# Altium PCB glasses_full_v1_small_revised.PcbDoc (part 1 of 2)
Units mm, origin at the board's own origin, x right, y up, seen from the top; angles counter-clockwise.
Board outline 153.91 x 57.09 mm, 2 copper layers (Top Layer, Bottom Layer); 20 components, 42 nets, 149 pads, 104 vias.
Unrouted connection lines stored in the file: 17.
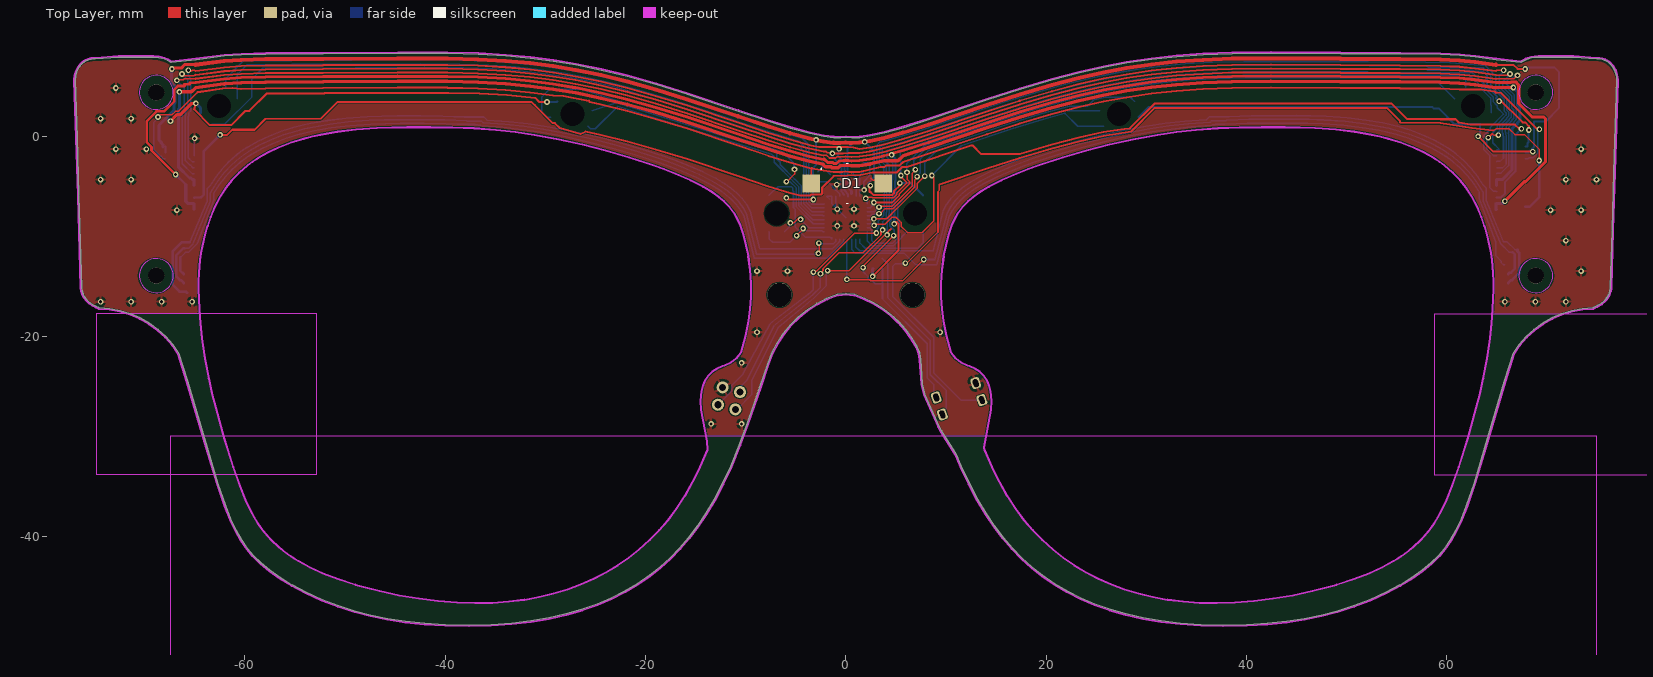
[diagram p0: Top Layer view]
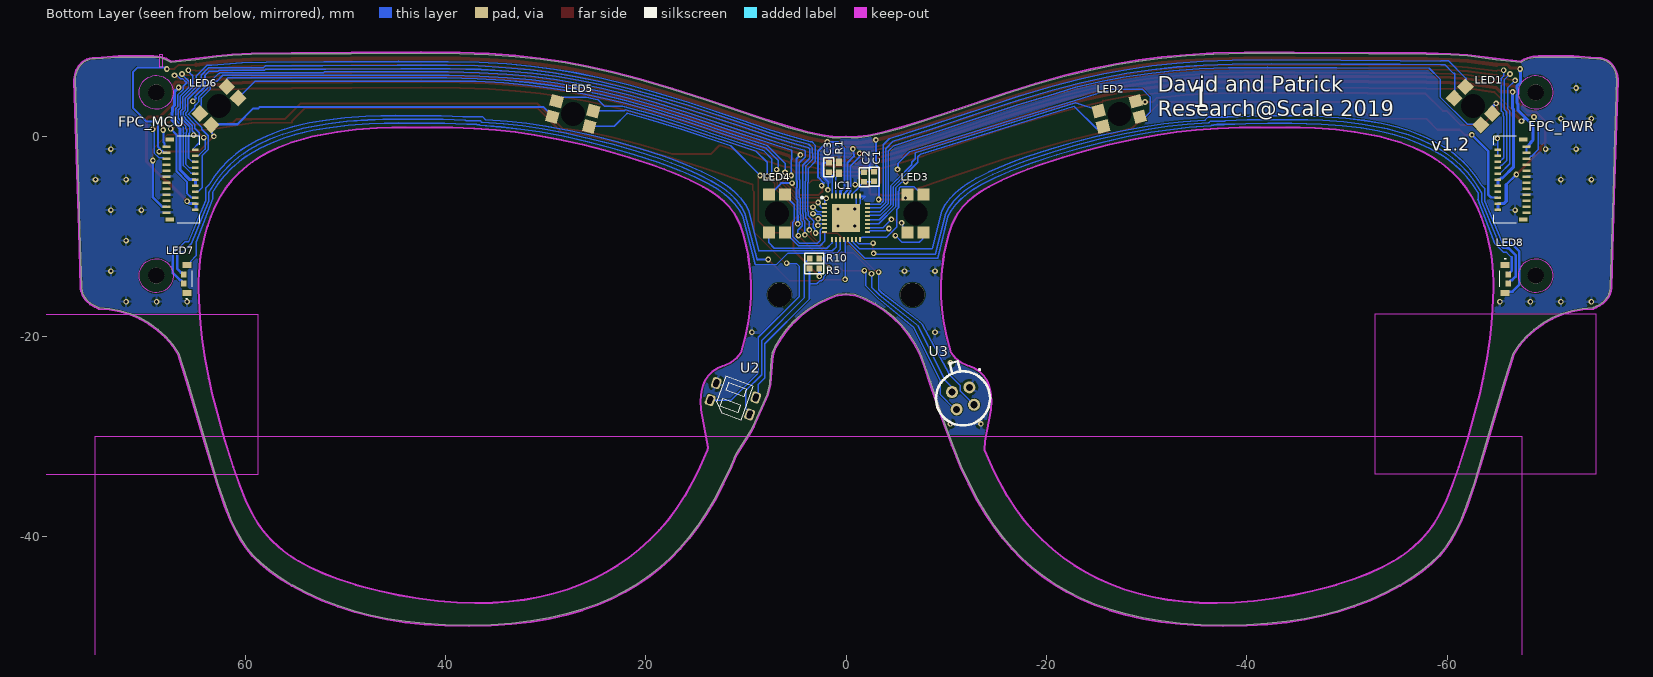
[diagram p1: Bottom Layer view, seen from below]
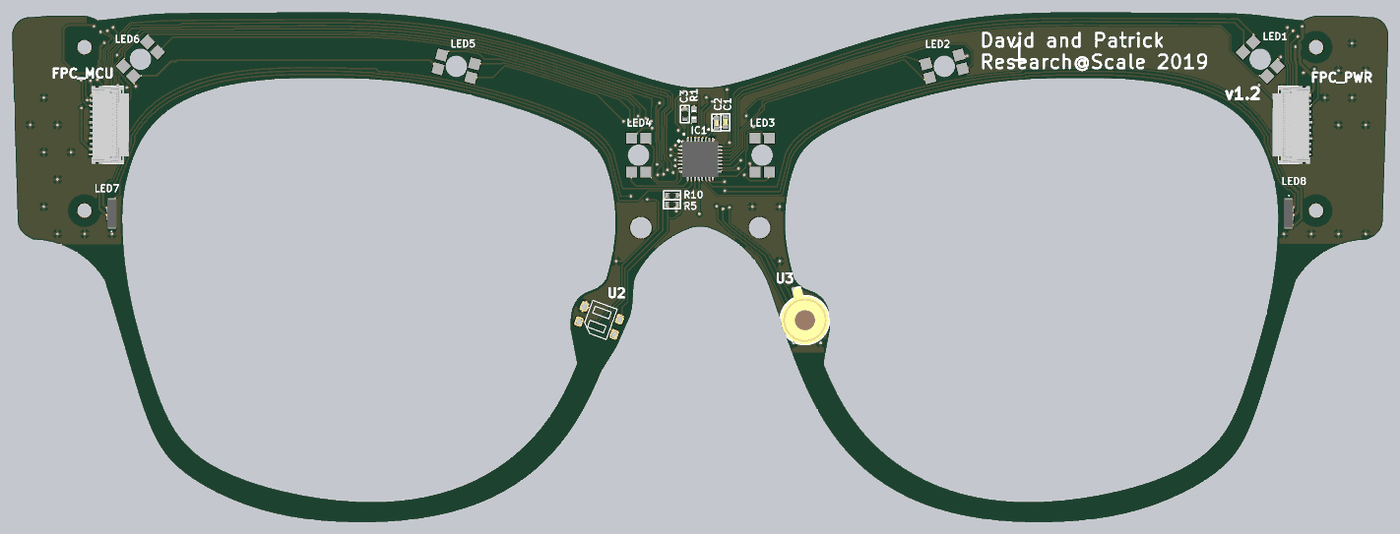
[diagram p3: 3D render of the assembled board from below, using the file's embedded part models]

## Layer stack, top to bottom
Top Solder: solder mask 0.0102, Solder Resist, Dk 3.5
Top Layer: signal copper 0.0356
Dielectric 1: dielectric 0.32, FR-4, Dk 4.8
Bottom Layer: signal copper 0.0356
Bottom Solder: solder mask 0.0102, Solder Resist, Dk 3.5

## Board outline
65.741,-24.446 63.803,-31.059 62.719,-34.637 61.953,-36.875 61.417,-38.237 60.894,-39.354 60.348,-40.316 59.766,-41.157 59.185,-41.848 58.442,-42.575 57.522,-43.332 56.484,-44.067 55.302,-44.787 53.931,-45.509 52.317,-46.242 50.683,-46.873 49.032,-47.404 47.466,-47.811 45.796,-48.153 44.01,-48.426 42.098,-48.627 40.019,-48.752 37.637,-48.794 35.443,-48.742 33.399,-48.601 31.48,-48.376 29.669,-48.068 27.959,-47.681 26.359,-47.222 24.861,-46.693 23.459,-46.096 22.112,-45.414 20.828,-44.651 19.617,-43.815 18.579,-42.992 17.58,-42.091 16.625,-41.117 15.721,-40.072 14.848,-38.931 13.998,-37.671 13.168,-36.278 12.354,-34.729 11.536,-32.966 11.196,-32.136 10.96,-31.678 9.514,-29.375 9.311,-28.992 7.877,-25.746 7.627,-24.724 7.471,-22.267 7.365,-21.643 7.129,-21.056 6.593,-20.149 5.971,-19.298 5.271,-18.512 4.497,-17.796 3.659,-17.158 2.763,-16.604 1.817,-16.139 0.832,-15.767 0.01,-15.692 -0.812,-15.767 -1.873,-16.172 -2.886,-16.684 -3.84,-17.299 -4.726,-18.01 -5.532,-18.809 -6.252,-19.687 -6.876,-20.636 -7.399,-21.644 -7.814,-22.701 -8.581,-24.999 -9.845,-28.673 -10.64,-30.827 -11.516,-32.966 -12.334,-34.729 -13.149,-36.278 -13.979,-37.671 -14.829,-38.931 -15.701,-40.072 -16.606,-41.117 -17.56,-42.091 -18.559,-42.992 -19.598,-43.815 -20.809,-44.651 -22.092,-45.414 -23.44,-46.096 -24.842,-46.693 -26.339,-47.222 -27.94,-47.681 -29.65,-48.068 -31.46,-48.376 -33.379,-48.601 -35.424,-48.742 -37.618,-48.794 -40,-48.752 -42.079,-48.627 -43.991,-48.426 -45.776,-48.153 -47.447,-47.811 -49.013,-47.404 -50.664,-46.873 -52.298,-46.242 -53.911,-45.509 -55.283,-44.787 -56.464,-44.067 -57.503,-43.332 -58.423,-42.575 -59.165,-41.848 -59.747,-41.157 -60.329,-40.316 -60.875,-39.354 -61.398,-38.237 -61.934,-36.876 -62.699,-34.637 -63.784,-31.059 -65.722,-24.446 -66.588,-21.682 -67.193,-20.804 -67.893,-20 -68.678,-19.28 -69.54,-18.652 -70.466,-18.125 -71.445,-17.704 -72.466,-17.397 -73.514,-17.205 -74.578,-17.133 -74.578,-17.129 -74.579,-17.126 -74.581,-17.121 -74.586,-17.116 -74.593,-17.108 -74.61,-17.096 -74.646,-17.076 -74.724,-17.04 -74.888,-16.97 -75.21,-16.805 -75.475,-16.624 -75.734,-16.387 -75.991,-16.067 -76.17,-15.726 -76.26,-15.432 -76.299,-15.133 -76.591,-5.903 -76.771,-0.135 -76.947,5.632 -76.91,6.065 -76.789,6.489 -76.597,6.863 -76.46,7.051 -76.314,7.21 -76.163,7.343 -76.062,7.419 -75.957,7.487 -75.634,7.643 -75.34,7.721 -75.122,7.742 -74.932,7.733 -72.605,7.92 -69.151,7.92 -68.599,7.871 -68.064,7.727 -67.712,7.576 -67.378,7.387 -64.895,7.659 -62.055,8.027 -60.356,8.149 -57.919,8.216 -52.176,8.244 -44.733,8.291 -39.761,8.285 -36.684,8.204 -33.938,8.046 -31.5,7.818 -29.201,7.519 -26.95,7.142 -24.426,6.622 -21.795,5.978 -18.966,5.186 -15.8,4.204 -10.747,2.514 -7.692,1.492 -5.538,0.82 -3.596,0.291 -2.223,0.002 -1.209,-0.131 -0.539,-0.153 0.01,-0.1 0.576,-0.153 1.378,-0.118 2.44,0.037 3.855,0.35 5.74,0.874 8.343,1.7 14.101,3.64 17.389,4.701 20.596,5.648 23.288,6.351 25.729,6.899 28.03,7.33 30.522,7.699 33.033,7.97 35.665,8.155 38.568,8.263 42.467,8.3 49.394,8.256 55.358,8.236 59.379,8.186 61.283,8.095 62.844,7.938 64.933,7.657 67.397,7.387 67.917,7.661 68.418,7.828 68.791,7.897 69.17,7.92 72.624,7.92 74.952,7.733 75.225,7.737 75.51,7.688 75.747,7.606 75.976,7.487 76.143,7.374 76.24,7.295 76.333,7.21 76.576,6.923 76.779,6.558 76.915,6.138 76.955,5.885 76.967,5.632 76.683,-3.596 76.502,-9.364 76.319,-15.133 76.269,-15.476 76.153,-15.81 75.979,-16.114 75.87,-16.257 75.753,-16.387 75.418,-16.682 75.007,-16.924 74.615,-17.106 74.604,-17.116 74.6,-17.123 74.598,-17.127 74.597,-17.13 74.597,-17.133 73.534,-17.205 72.485,-17.397 71.465,-17.704 70.485,-18.125 69.559,-18.652 68.698,-19.28 67.912,-20 67.212,-20.804 66.607,-21.682
cut-out: -41.47,0.938 -43.854,0.94 -45.342,0.915 -46.827,0.859 -48.917,0.71 -50.787,0.487 -52.457,0.2 -53.297,0.016 -54.133,-0.197 -55.401,-0.588 -56.637,-1.065 -57.722,-1.576 -58.692,-2.127 -59.249,-2.494 -59.786,-2.894 -60.58,-3.585 -61.303,-4.347 -61.888,-5.09 -62.466,-5.978 -62.978,-6.947 -63.416,-7.99 -63.719,-8.88 -63.976,-9.78 -64.248,-10.89 -64.386,-11.592 -64.491,-12.301 -64.598,-13.602 -64.622,-14.42 -64.621,-15.24 -64.548,-17.191 -64.441,-18.652 -64.291,-20.105 -64,-22.132 -63.617,-24.145 -63.281,-25.615 -62.909,-27.077 -62.036,-30.207 -61.17,-32.986 -60.51,-34.875 -59.945,-36.271 -59.413,-37.387 -59.07,-38.009 -58.694,-38.615 -58.063,-39.479 -57.354,-40.282 -56.646,-40.953 -55.805,-41.619 -55.241,-42.007 -54.658,-42.369 -53.53,-42.98 -52.199,-43.587 -50.693,-44.168 -48.984,-44.725 -47.772,-45.064 -46.549,-45.367 -44.605,-45.777 -42.647,-46.106 -40.718,-46.345 -38.829,-46.494 -37.022,-46.553 -35.281,-46.524 -33.656,-46.413 -32.103,-46.222 -30.622,-45.956 -29.185,-45.612 -27.812,-45.198 -26.492,-44.713 -25.126,-44.106 -23.932,-43.481 -22.784,-42.788 -21.692,-42.031 -20.664,-41.219 -19.568,-40.23 -18.638,-39.274 -17.771,-38.263 -16.903,-37.106 -16.081,-35.845 -15.305,-34.473 -14.575,-32.986 -13.83,-31.254 -13.869,-30.406 -14.471,-27.242 -14.505,-26.343 -14.4,-25.415 -14.281,-24.854 -14.058,-24.327 -13.738,-23.851 -13.334,-23.444 -12.86,-23.122 -12.333,-22.896 -12.119,-22.828 -11.479,-22.537 -10.925,-22.104 -10.486,-21.555 -10.047,-19.902 -9.736,-18.4 -9.561,-17.195 -9.466,-15.98 -9.462,-14.634 -9.554,-13.288 -9.75,-11.889 -9.964,-10.838 -10.237,-9.798 -10.544,-8.884 -10.832,-8.225 -11.185,-7.603 -11.644,-6.987 -12.178,-6.43 -12.731,-5.965 -13.316,-5.548 -14.243,-4.99 -15.533,-4.338 -17.082,-3.664 -18.182,-3.235 -19.293,-2.833 -21.631,-2.069 -23.997,-1.385 -26.317,-0.789 -28.654,-0.266 -31.083,0.186 -33.006,0.47 -34.937,0.683 -37.107,0.837 -39.288,0.914
cut-out: 45.361,0.915 43.873,0.94 41.489,0.938 39.307,0.914 37.127,0.837 34.956,0.683 33.026,0.47 31.102,0.186 28.674,-0.266 26.336,-0.789 24.016,-1.385 21.65,-2.069 19.312,-2.833 18.201,-3.235 17.101,-3.664 15.553,-4.338 14.262,-4.99 13.336,-5.548 12.75,-5.965 12.197,-6.43 11.663,-6.987 11.204,-7.603 10.851,-8.225 10.563,-8.884 10.256,-9.798 9.983,-10.838 9.769,-11.889 9.574,-13.288 9.481,-14.634 9.486,-15.98 9.58,-17.195 9.755,-18.4 10.066,-19.902 10.505,-21.555 10.944,-22.104 11.499,-22.537 12.139,-22.828 12.352,-22.896 12.879,-23.122 13.353,-23.444 13.757,-23.851 14.077,-24.327 14.3,-24.854 14.419,-25.415 14.524,-26.343 14.491,-27.242 13.77,-31.029 13.768,-31.041 13.849,-31.254 14.594,-32.986 15.324,-34.473 16.1,-35.845 16.923,-37.106 17.79,-38.263 18.658,-39.274 19.588,-40.23 20.684,-41.219 21.712,-42.031 22.804,-42.788 23.952,-43.481 25.145,-44.106 26.512,-44.713 27.831,-45.198 29.205,-45.612 30.641,-45.956 32.122,-46.222 33.676,-46.413 35.3,-46.524 37.041,-46.553 38.848,-46.494 40.737,-46.345 42.666,-46.106 44.625,-45.777 46.568,-45.367 47.791,-45.064 49.004,-44.725 50.713,-44.168 52.219,-43.587 53.55,-42.98 54.677,-42.369 55.26,-42.007 55.825,-41.619 56.666,-40.953 57.373,-40.282 58.082,-39.479 58.714,-38.615 59.09,-38.009 59.432,-37.387 59.965,-36.271 60.53,-34.875 61.19,-32.986 62.055,-30.207 62.929,-27.077 63.3,-25.615 63.636,-24.145 64.02,-22.132 64.31,-20.105 64.46,-18.652 64.568,-17.191 64.641,-15.24 64.642,-14.42 64.618,-13.602 64.51,-12.301 64.405,-11.592 64.268,-10.89 63.995,-9.78 63.738,-8.88 63.436,-7.99 62.997,-6.947 62.486,-5.978 61.908,-5.09 61.322,-4.347 60.6,-3.585 59.805,-2.894 59.268,-2.494 58.711,-2.126 57.741,-1.576 56.656,-1.065 55.42,-0.588 54.152,-0.197 53.316,0.016 52.476,0.2 50.807,0.487 48.936,0.71 46.847,0.859

## Design rules (kind name [scope] priority, off if disabled: settings)
Clearance [All] p1: gap=0.102 ignorepadtopadclearanceinfootprint=FALSE except(0: Arc-Hole Track-Hole SMDPad-Hole THPad-Hole Via-Hole Fill-Hole Poly-Hole Region-Hole Text-Hole)
PolygonConnect [All] p1: connectstyle=Relief reliefconductorwidth=0.254 reliefentries=4 polygonreliefangle="90 Angle" airgapwidth=0.254
RoutingVias [All] p1: holewidth=0.305 width=0.559 viastyle="Through Hole" minholewidth=0.254 minwidth=0.508 maxholewidth=0.381 maxwidth=0.635
SolderMaskExpansion [All] p1: expansion=0.102
Width PWR [InNet('3.3V') or InNet('5V')or InNet('VBAT')] p1: maxlimit=0.406 minlimit=0.203 preferedwidth=0.305 minimp=50.000000 maximp=50.000000 favimp=50.000000
Width [All] p2: maxlimit=0.305 minlimit=0.152 preferedwidth=0.254
30 further rules are at their usual default settings.

## Classes and differential pairs
component class Sch_led: C1 C2 C3 IC1 LED1 LED2 LED3 LED4 LED5 LED6 LED7 LED8 R1
component class Sch_front: D1 FPC_MCU FPC_PWR R5 R10 U2 U3 U4 U5 U8 U9

## Components (designator, comment, footprint, x,y, rotation, side; value= is the part's Value field where it differs from the comment)
C1 "0.10µF" 0402C -2.794,-4.013 r90 bottom
C2 "10µF" 0402C -1.803,-4.064 r90 bottom
C3 "1µF" 0402R 1.727,-3.099 r270 bottom
D1 "VBPW34FASR" VBPW34FAS 0.137,-4.699 r0 top
FPC_MCU "502250-2391" 5022502391 66.304,-4.318 r270 bottom
FPC_PWR "502250-2391" 5022502391 -66.411,-4.318 r90 bottom
IC1 "LP5024RSMR" QFN40P400X400X100-33N-D 0,-8.128 r180 bottom
LED1 "156120M173000" 156120M173000 -62.611,3.048 r45 bottom
LED2 "156120M173000" 156120M173000 -27.283,2.248 r345 bottom
LED3 "156120M173000" 156120M173000 -6.907,-7.7 r270 bottom
LED4 "156120M173000" 156120M173000 6.907,-7.7 r270 bottom
LED5 "156120M173000" 156120M173000 27.283,2.248 r195 bottom
LED6 "156120M173000" 156120M173000 62.611,3.048 r135 bottom
LED7 "155124M173200" 155124M173200 65.796,-14.224 r90 bottom
LED8 "155124M173200" 155124M173200 -65.776,-14.224 r270 bottom
R1 "4.7k" RESC1005X35N 0.711,-3.15 r90 bottom
R5 "50K" 0402R 3.175,-13.208 r180 bottom
R10 "100" 0402R 3.165,-12.192 r180 bottom
U2 "QRE1113" QRE1113_DIP 12.964,-24.638 r290 bottom
U3 "ZTP-135SR" ZTP-135SR -11.674,-26.162 r210 bottom

## Footprints (in the part's own frame and the unit in brackets; to place one, negate y for a bottom-side part, rotate by r counter-clockwise, add the part's x,y. Pads: shape width x height; smd on the part's side, far side on the other; paste and mask are expansions set on the pad)
0402C [mm]
  rect 0.559x0.6 smd: 1(-0.48,0) 2(0.48,0)
  silkscreen extent -0.95,-0.5 0.95,0.5, body extent -0.48,-0.25 0.48,0.25, height 0.5
0402R [mm]
  rect 0.559x0.6 smd: 1(-0.48,0) 2(0.48,0)
  silkscreen extent -0.95,-0.5 0.95,0.5, body extent -0.46,-0.25 0.5,0.25, height 0.3
155124M173200 [mm]
  rect 0.6x0.9 smd: 1(-1.4,0) 2(1.4,0)
  rect 0.6x0.55 smd: 3(-0.45,0.325) 4(0.45,0.325)
  silkscreen extent -2.05,-0.5 0.8,0.1, body extent -1.6,-0.5 1.6,0.5, height 1.1
156120M173000 [mm]
  rect 1.2x1.2 smd: 1(-1.9,-0.8) 2(-1.9,0.8) 3(1.9,0.8) 4(1.9,-0.8)
  round 0 hole 2.4 unplated: ""(0,0)
5022502391 [mm]
  rect 0.26x0.8 smd: 1(-3.3,-1.545) 3(-2.7,-1.545) 5(-2.1,-1.545) 7(-1.5,-1.545) 9(-0.9,-1.545) 11(-0.3,-1.545) 13(0.3,-1.545) 15(0.9,-1.545) 17(1.5,-1.545) 19(2.1,-1.545) 21(2.7,-1.545) 23(3.3,-1.545)
  rect 0.26x0.65 smd: 2(-3,1.33) 4(-2.4,1.33) 6(-1.8,1.33) 8(-1.2,1.33) 10(-0.6,1.33) 12(0,1.33) 14(0.6,1.33) 16(1.2,1.33) 18(1.8,1.33) 20(2.4,1.33) 22(3,1.33)
  rect 0.4x0.85 smd: MP1(-4,-1.22) MP2(4,-1.22)
  silkscreen extent -4.35,-0.5 4.35,1.77, body extent -4.35,-1.76 4.35,2.43, height 0.9
QFN40P400X400X100-33N-D [mm]
  rect 0.5x0.2 smd: 1(-2.15,1.4) 2(-2.15,1) 3(-2.15,0.6) 4(-2.15,0.2) 5(-2.15,-0.2) 6(-2.15,-0.6) 7(-2.15,-1) 8(-2.15,-1.4) 17(2.15,-1.4) 18(2.15,-1) 19(2.15,-0.6) 20(2.15,-0.2) 21(2.15,0.2) 22(2.15,0.6) 23(2.15,1) 24(2.15,1.4)
  rect 0.2x0.5 smd: 9(-1.4,-2.15) 10(-1,-2.15) 11(-0.6,-2.15) 12(-0.2,-2.15) 13(0.2,-2.15) 14(0.6,-2.15) 15(1,-2.15) 16(1.4,-2.15) 25(1.4,2.15) 26(1,2.15) 27(0.6,2.15) 28(0.2,2.15) 29(-0.2,2.15) 30(-0.6,2.15) 31(-1,2.15) 32(-1.4,2.15)
  rect 2.8x2.8 smd: 33(0,0)
  silkscreen extent -2.5,1.9 -2.3,2.1, body extent -2.05,-2.05 2.05,2.05, height 1
QRE1113_DIP [mm] "QRE1113 IR PHOTODIODE/TRANSISTOR PAIR"
  rrect50% 1.1x0.9 hole 0.5 slot 0.8 at 0 deg: 1(1.8,0) 2(1.8,4.2) 3(0,4.2) 4(0,0)
  silkscreen extent -0.96,0.65 2.64,3.55
RESC1005X35N [mm]
  rect 0.75x0.6 smd: 1(-0.55,0) 2(0.55,0)
  body extent -0.5,-0.25 0.5,0.25, height 0.35
VBPW34FAS [mm] "IR Photodiode SMD (Vive)"
  rect 1.75x1.8 smd: 1(-3.575,0) 2(3.575,0)
  silkscreen extent -2.65,-2 0.08,2, body extent -3.29,-1.95 3.11,1.95, height 1.48
ZTP-135SR [mm]
  round 1.2 hole 0.7: 1(0,1.27) 2(1.27,0) 3(0,-1.27) 4(-1.27,0)
  silkscreen extent -2.9,-2.7 2.7,3.35, body extent -4.43,-3.77 3.8,4.46, height 3.4

## Part data
C1: library part GCM155R71C104KA55D, "CAP CER 0.1UF 16V X7R 0402", Digi-Key Part Number=490-4759-1-ND, Manufacturer="Murata Electronics North America", Operating Temperature="-55°C ~ 125°C", Package / Case="0402 (1005 Metric)", Ratings=AEC-Q200, Temperature Coefficient=X7R, Tolerance=±10%, Voltage=16V, @ qty=0, Applications=Automotive, Datasheets=http://www.murata.com/~/media/webrenewal/support/library/catalog/products/capacitor/mlcc/c03e.ashx, Factory Stock=0, Features=-, Height - Seated (Max)=-, Image=//media.digikey.com/Renders/Murata%20Renders/ZRB-SERIES-0402.jpg, Lead Spacing=-, Lead Style=-, Minimum Quantity=1, Mounting Type="Surface Mount, MLCC", Packaging="Cut Tape (CT)", Part Number=GCM155R71C104KA55D, Part Status=Active, Quantity Available=734194, Series=GCM, Size / Dimension="0.039\" L x 0.020\" W (1.00mm x 0.50mm)", Thickness (Max)="0.022\" (0.55mm)", Unit Price (USD)=0.1
C2: library part GRJ155R60J106ME11D, "CAP CER 10UF 6.3V X5R 0402", Digi-Key Part Number=490-13211-1-ND, Manufacturer="Murata Electronics North America", Operating Temperature="-55°C ~ 85°C", Package / Case="0402 (1005 Metric)", Ratings=-, Temperature Coefficient=X5R, Tolerance=±20%, Voltage=6.3V, @ qty=0, Applications="Boardflex Sensitive", Datasheets=http://psearch.en.murata.com/capacitor/product/GRJ155R60J106ME11%23.pdf, Factory Stock=0, Features="Derating Recommended, Soft Termination", Height - Seated (Max)=-, Image=//media.digikey.com/Renders/Murata%20Renders/ZRB-SERIES-0402.jpg, Lead Spacing=-, Lead Style=-, Minimum Quantity=1, Mounting Type="Surface Mount, MLCC", Packaging="Cut Tape (CT)", Part Number=GRJ155R60J106ME11D, Part Status=Active, Quantity Available=64064, Series=GRJ, Size / Dimension="0.039\" L x 0.020\" W (1.00mm x 0.50mm)", Thickness (Max)="0.028\" (0.70mm)", Unit Price (USD)=0.23
C3: library part GCM155C71A105KE38D, "CAP CER 1UF 10V X7S 0402", Digi-Key Part Number=490-13409-1-ND, Manufacturer="Murata Electronics North America", Operating Temperature="-55°C ~ 125°C", Package / Case="0402 (1005 Metric)", Ratings=AEC-Q200, Temperature Coefficient=X7S, Tolerance=±10%, Voltage=10V, @ qty=0, Applications=Automotive, Datasheets=http://www.murata.com/~/media/webrenewal/support/library/catalog/products/capacitor/mlcc/c03e.ashx, Factory Stock=0, Features=-, Height - Seated (Max)=-, Image=//media.digikey.com/Renders/Murata%20Renders/ZRB-SERIES-0402.jpg, Lead Spacing=-, Lead Style=-, Minimum Quantity=1, Mounting Type="Surface Mount, MLCC", Packaging="Cut Tape (CT)", Part Number=GCM155C71A105KE38D, Part Status=Active, Quantity Available=7240, Series=GCM, Size / Dimension="0.039\" L x 0.020\" W (1.00mm x 0.50mm)", Thickness (Max)="0.022\" (0.55mm)", Unit Price (USD)=0.12
D1: "Diode", Manufacturer_Name=Vishay, Mouser Part Number=782-VBPW34FASR, RS Part Number=7689401, Datasheet Link=https://www.vishay.com/docs/81127/vbpw34fa.pdf, Height=1.3mm, Manufacturer_Part_Number=VBPW34FASR, Mouser Price/Stock=https://www.mouser.com/Search/Refine.aspx?Keyword=782-VBPW34FASR, RS Price/Stock=https://uk.rs-online.com/web/p/products/7689401
FPC_MCU FPC_PWR: "Connector", Manufacturer_Name=Molex, Mouser Part Number=538-502250-2391, Datasheet Link=https://www.molex.com/pdm_docs/sd/5022501791_sd.pdf, Height=1.85mm, Manufacturer_Part_Number=502250-2391, Mouser Price/Stock=https://www.mouser.com/Search/Refine.aspx?Keyword=538-502250-2391, System=Connector
IC1: "Integrated Circuit", Manufacturer_Name="Texas Instruments", Mouser Part Number=595-LP5024RSMR, Datasheet Link=http://www.ti.com/lit/gpn/lp5024, Height=1mm, Manufacturer_Part_Number=LP5024RSMR, Mouser Price/Stock=https://www.mouser.com/Search/Refine.aspx?Keyword=595-LP5024RSMR
LED1 LED2 LED3 LED4 LED5 LED6: "LED", Manufacturer_Name="Wurth Elektronik", Mouser Part Number=710-156120M173000, RS Part Number=1847218, Datasheet Link=https://katalog.we-online.de/led/datasheet/156120M173000.pdf, Height=1.25mm, Manufacturer_Part_Number=156120M173000, Mouser Price/Stock=https://www.mouser.com/Search/Refine.aspx?Keyword=710-156120M173000, RS Price/Stock=https://uk.rs-online.com/web/p/products/1847218
LED7 LED8: "LED", Manufacturer_Name="Wurth Elektronik", Mouser Part Number=710-155124M173200, RS Part Number=1766176P, Datasheet Link=https://www.mouser.com/ds/2/445/155124M173200-1113601.pdf, Height=1mm, Manufacturer_Part_Number=155124M173200, Mouser Price/Stock=https://www.mouser.com/Search/Refine.aspx?Keyword=710-155124M173200, RS Price/Stock=http://uk.rs-online.com/web/p/products/1766176P
R1: library part CRCW04024K70FKEDC, "Resistor_4.7k", Manufacturer_Name=Vishay, Mouser Part Number=71-CRCW04024K70FKEDC, Datasheet Link=http://www.mouser.com/datasheet/2/427/crcwce3-1223726.pdf, Height=0.35mm, Manufacturer_Part_Number=CRCW04024K70FKEDC, Mouser Price/Stock=https://www.mouser.com/Search/Refine.aspx?Keyword=71-CRCW04024K70FKEDC
R5 R10: library part Resistor
U2: "IR Emitter and Receiver"
U3: "Undefined or Miscellaneous", Manufacturer_Name="Amphenol Advanced Sensors", Mouser Part Number=527-ZTP-135SR, Allied_Number=70282698, Allied Price/Stock=https://www.alliedelec.com/amphenol-advanced-sensors-ztp-135sr/70282698/, Datasheet Link=https://www.amphenol-sensors.com/en/component/edocman/370-thermopile-ir-sensor-applications/download?Itemid=7967, Manufacturer_Part_Number=ZTP-135SR, Mouser Price/Stock=https://www.mouser.com/Search/Refine.aspx?Keyword=527-ZTP-135SR

## Free pads (board coordinates)
  round 1.6 hole 1.6: 1(-68.859,-13.907) 1(-68.859,4.39) 1(68.879,-13.907) 1(68.879,4.39)
  round 2.4 hole 2.4: 1(-6.626,-15.82) 1(6.646,-15.82)

## Via types
v1: diameter 0.559, hole 0.305, Top Layer to Bottom Layer, tented both sides, 100 vias
v2: diameter 0.559, hole 0.305, Top Layer to Bottom Layer, tented top, 4 vias

## Nets (pads, with @x,y where several pads share a name; then routed paths per layer and width w, separated by ;. In a path a pad name is that pad's centre, name@x,y a point inside that pad or via, vN(x,y) a via of type N, cw(c..) or ccw(c..) an arc to the next point about the centre after c; other vN are vias at no path point)
3.3V: FPC_MCU.20 FPC_MCU.22 FPC_PWR.2 FPC_PWR.4 R5.2 | length 185.1
  Top Layer w0.203: v1(2.667,-13.97) 5.254,-11.383 5.254,-9.71 5.232,-9.688 5.232,-8.707 5.055,-8.529 4.846,-8.738 v1(4.826,-8.738)
  Top Layer w0.254: v1(-66.929,-3.81) -69.332,-1.407 -69.332,-1.06 -69.799,-0.593 -69.799,1.531 -68.841,2.489 -68.072,2.489 -67.056,3.505 -67.056,4.674 -66.7,5.029 -66.04,5.029 -66.04,5.207 -65.532,5.207 -65.532,5.334 -65.449,5.334 ccw(c-65.449,5.466) -65.356,5.373 -64.925,5.373
  Top Layer w0.305: -64.925,5.373 -62.084,5.74 -60.385,5.862 -57.949,5.93 -52.205,5.957 -44.762,6.004 -39.79,5.998 -36.713,5.917 -33.967,5.759 -31.529,5.532 -29.23,5.233 -26.979,4.855 -24.455,4.335 -21.824,3.691 -18.995,2.899 -15.829,1.917 -10.776,0.228 -7.721,-0.794 -5.567,-1.467 -3.625,-1.995 -2.252,-2.285 -2.149,-2.285 -1.819,-2.615 -1.308,-2.615 -1.218,-2.705 -0.936,-2.705 -0.693,-2.462 -0.591,-2.462 -0.568,-2.439 -0.019,-2.386 0.547,-2.44 1.349,-2.404 2.411,-2.249 3.826,-1.936 v1@4.528,-1.741 ; v1(4.559,-1.852) 4.559,-1.732 5.711,-1.412 8.314,-0.587 14.072,1.353 17.36,2.415 20.567,3.362 23.259,4.064 25.7,4.612 28.001,5.044 30.493,5.413 33.003,5.683 35.636,5.868 38.539,5.976 42.438,6.013 49.365,5.97 55.329,5.949 59.349,5.9 61.254,5.808 62.815,5.652 64.904,5.37 66.389,5.37 66.429,5.41 66.972,5.41 66.972,5.309 67.183,5.098 67.183,3.277 68.529,1.93 69.69,1.93 69.85,1.77 69.85,-2.532 67.851,-4.531 67.732,-4.531 v1(65.786,-6.477)
  Bottom Layer w0.203: v1(4.559,-1.852) 4.953,-2.246 4.953,-4.423 4.902,-4.474 4.902,-5.077 4.953,-5.127 4.953,-6.226 4.851,-6.327 4.851,-7.95 4.826,-7.925 v1(4.826,-8.738)
  Bottom Layer w0.254: v1(-66.929,-3.81) -65.913,-4.826
  Bottom Layer w0.305: -65.913,-4.826 -65.913,-6.477 -65.672,-6.718 FPC_PWR.4@-65.081,-6.718 FPC_PWR.2@-65.081,-7.318 ; v1(2.667,-13.97) 2.667,-13.236 R5.2@2.695,-13.208 ; FPC_MCU.22@64.974,-7.318 64.919,-7.318 64.897,-7.296 64.897,-6.74 64.919,-6.718 FPC_MCU.20@64.974,-6.718 65.545,-6.718 v1(65.786,-6.477)
5V: FPC_MCU.12 FPC_MCU.14 FPC_PWR.10 FPC_PWR.12 | length 157.7
  Top Layer w0.305: 64.904,4.862 66.623,4.862 66.65,4.836 v1(66.65,4.877)
  Top Layer w0.356: v1(-66.548,4.445) -65.344,4.445 -64.925,4.865 -62.084,5.232 -60.385,5.354 -57.949,5.422 -52.205,5.449 -44.762,5.496 -39.79,5.49 -36.713,5.409 -33.967,5.251 -31.529,5.024 -29.23,4.725 -26.979,4.347 -24.455,3.827 -21.824,3.183 -18.995,2.391 -15.829,1.409 -10.776,-0.28 -7.721,-1.302 -5.567,-1.975 -3.625,-2.503 -2.252,-2.793 -2.252,-2.827 -2.032,-3.047 -1.487,-3.047 -1.397,-3.136 -0.757,-3.136 -0.568,-2.947 -0.019,-2.894 0.547,-2.948 1.349,-2.912 2.411,-2.757 3.826,-2.444 5.194,-2.444 5.711,-1.927 ; 5.711,-1.92 8.314,-1.095 14.072,0.845 17.36,1.907 20.567,2.854 23.259,3.556 25.7,4.104 28.001,4.536 30.493,4.905 33.003,5.175 35.636,5.36 38.539,5.468 42.438,5.505 49.365,5.462 55.329,5.441 59.349,5.392 61.254,5.3 62.815,5.144 64.904,4.862
  Bottom Layer w0.305: v1(-66.548,4.445) -66.548,4.14 -66.523,4.114 -66.523,2.841 -66.625,2.738 -66.625,2.41 -66.65,2.386 -66.65,-3.036 -65.533,-4.153 -65.397,-4.153 -65.231,-4.318 FPC_PWR.12@-65.081,-4.318 FPC_PWR.10@-65.081,-4.918 ; FPC_MCU.14@64.974,-4.918 FPC_MCU.12@64.974,-4.318 65.532,-4.318 66.497,-3.353 66.497,0.737 67.076,1.315 67.076,1.378 67.31,1.612 67.31,2.371 67.263,2.418 67.263,2.89 67.076,3.077 67.076,4.45 v1(66.65,4.877)
ANALOG_EXP_CONN: FPC_MCU.18 FPC_PWR.6 | length 153.7
  Top Layer w0.203: v1(-62.484,0.152) -61.773,0.152 -61.265,0.66 -59.027,0.66 -57.949,1.739 -52.425,1.765 -50.736,3.454 -31.406,3.454 -31.076,3.124 -31.064,3.124 -29.261,1.321 -29.058,1.321 -28.55,0.813 -26.518,0.254 -26.008,0.464 -24.455,0.144 -21.824,-0.5 -18.995,-1.292 -15.829,-2.274 -10.776,-3.963 -7.721,-4.985 -5.567,-5.658 -4.596,-5.922 -3.557,-5.922 -3.437,-5.802 -2.479,-5.802 -2.36,-5.683 -2.36,-5.103 -1.229,-3.972 1.475,-3.852 2.633,-3.596 5.102,-3.596 5.65,-3.048 6.096,-3.048 12.497,-0.914 12.649,-0.914 13.511,-1.776 17.36,-1.776 20.567,-0.829 23.259,-0.127 25.7,0.421 27.818,0.719 28.354,0.794 30.862,3.302 54.458,3.302 56.018,1.741 56.693,1.741 59.349,1.709 60.877,1.709 61.214,1.372 62.367,1.19 62.438,1.179 64.904,1.179 ; 64.904,1.181 66.795,1.181 67.214,0.762 v1(67.437,0.762)
  Bottom Layer w0.203: FPC_MCU.18@64.974,-6.118 64.996,-6.096 65.405,-6.096 65.786,-5.715 65.786,-4.567 66.853,-3.5 66.853,0.178 v1(67.437,0.762)
  Bottom Layer w0.254: FPC_PWR.6@-65.081,-6.118 -64.389,-6.096 -64.135,-5.842 -64.135,-1.499 v1(-62.484,0.152)
BLINK_PWM: FPC_MCU.21 U2.1 | length 98.8
  Top Layer w0.152: v1(5.944,-12.649) 6.045,-12.7 9.195,-9.55 9.195,-5.512 9.343,-5.364 9.343,-4.812 ; 64.59,0.563 64.94,0.762 66.217,0.762 66.801,0.178 67.767,0.178 69.215,-1.27 v1(69.215,-2.413)
  Top Layer w0.203: 9.343,-4.812 14.072,-3.219 17.36,-2.157 20.567,-1.21 23.259,-0.508 25.7,0.04 28.48,0.489 30.836,2.845 54,2.845 55.329,1.517 55.329,1.377 59.349,1.328 62.524,0.842 64.59,0.563
  Bottom Layer w0.152: v1@5.944,-12.7 4.953,-12.7 4.699,-12.954 4.699,-16.002 8.763,-20.066 8.763,-23.622 11.47,-26.329 U2.1@13.579,-26.329
  Bottom Layer w0.254: FPC_MCU.21@67.849,-7.018 67.852,-7.015 68.296,-7.015 69.215,-6.096 v1(69.215,-2.413)
BLINK_SIG: FPC_MCU.16 R5.1 U2.3 | length 105.9
  Top Layer w0.152: v1(1.727,-13.106) 1.727,-12.954 v1(4.772,-9.91)
  Bottom Layer w0.152: v1(1.727,-13.106) 1.727,-13.513 2.21,-13.995 2.21,-14.159 2.478,-14.427 2.642,-14.427 2.932,-14.718 3.655,-14.718 ; R5.1@3.655,-13.208 3.655,-14.718 ; v1(4.772,-9.91) 4.826,-9.855 4.826,-9.384 4.369,-8.927 4.369,-8.548 4.547,-8.37 4.547,-7.809 4.572,-7.784 4.572,-6.211 4.674,-6.11 4.674,-5.243 4.623,-5.192 4.623,-4.358 4.674,-4.307 4.674,-2.642 4.064,-2.032 4.064,-1.472 4.162,-1.374 5.496,-1.011 7.651,-0.338 10.706,0.683 15.759,2.373 18.925,3.355 21.754,4.147 24.385,4.791 26.908,5.311 29.16,5.688 31.459,5.988 33.897,6.215 36.643,6.373 39.719,6.454 44.692,6.46 52.088,6.46 52.192,6.356 62.504,6.356 62.594,6.265 62.67,6.265 63.729,5.207 63.729,4.837 64.618,3.948 64.618,3.468 65.038,3.048 65.038,2.853 65.663,2.227 64.324,0.889 64.324,0.709 63.678,0.062 63.678,-1.299 64.262,-1.883 64.262,-5.08 64.646,-5.464 64.92,-5.464 FPC_MCU.16@64.974,-5.518 ; U2.3@9.017,-26.074 8.791,-25.849 8.791,-25.482 8.763,-25.454 8.763,-24.765 8.128,-24.13 8.128,-20.701 3.655,-16.228 3.655,-14.718
GND: C1.2 C2.2 C3.1 D1.2 FPC_MCU.11 FPC_MCU.17 FPC_MCU.23 FPC_PWR.7 FPC_PWR.13 FPC_PWR.20 FPC_PWR.22 IC1.25 IC1.26 IC1.33 R1.2 R10.2 U2.4 U3.1 | length 13.6
  Top Layer w0.152: 2.489,-4.166 2.697,-4.374 3.387,-4.374 D1.2@3.712,-4.699
  Bottom Layer w0.152: FPC_PWR.20@-65.081,-1.918 FPC_PWR.22@-65.081,-1.318 -65.081,-0.26 v1(-65.024,-0.203) ; C1.2@-2.794,-3.533 -2.773,-3.533 -2.57,-3.33 -2.57,-3.309 -2.337,-3.076 -2.337,-2.591 ; C2.2@-1.803,-3.584 -1.783,-3.584 -1.58,-3.787 C2.2@-1.58,-3.808 ; -1.626,-6.299 -1.626,-6.266 -1.914,-5.978 IC1.25@-1.4,-5.978 -1.4,-6.728 IC1.33@-1,-7.128 ; IC1.26@-1,-5.978 IC1.33@-1,-7.128 ; v1(-0.914,-4.826) v1@-0.864,-4.877 ; v1@-0.864,-4.928 v1@-0.864,-4.877 ; -0.864,-4.524 v1@-0.864,-4.877 ; IC1.33@0,-8.128 IC1.33@-1,-7.128 ; C3.1@1.727,-2.619 2.298,-2.619 2.388,-2.708 2.388,-3.912 1.778,-4.521 1.778,-5.131 1.88,-5.232 1.88,-5.283 v1(1.829,-5.334)
  other v1: -13.452,-28.702 -10.404,-28.702 -10.404,-22.606 -8.88,-19.558 9.408,-19.558 -74.412,-16.51 -71.364,-16.51 -68.316,-16.51 -65.268,-16.51 65.796,-16.51 68.844,-16.51 71.892,-16.51 -8.88,-13.462 -5.832,-13.462 73.416,-13.462 71.892,-10.414 -66.792,-7.366 70.368,-7.366 73.416,-7.366 -74.412,-4.318 -71.364,-4.318 71.892,-4.318 74.94,-4.318 -72.888,-1.27 -69.84,-1.27 73.416,-1.27 -74.412,1.778 -71.364,1.778 -72.888,4.826
  other v2: -0.864,-8.941 0.813,-8.941 -0.864,-7.264 0.813,-7.264
I2C1_SCL: FPC_MCU.6 FPC_PWR.18 IC1.29 | length 158.9
  Top Layer w0.152: v1@-65.396,6.493 -65.379,6.493 -65.319,6.553 -65.288,6.553 -65.253,6.589 -64.998,6.589 -64.968,6.559 ; 64.904,6.513 64.995,6.604 v1(65.669,6.604)
  Top Layer w0.203: -64.925,6.516 -62.084,6.883 -60.385,7.005 -57.949,7.073 -52.205,7.1 -44.762,7.147 -39.79,7.141 -36.713,7.06 -33.967,6.902 -31.529,6.675 -29.23,6.376 -26.979,5.998 -24.455,5.478 -21.824,4.834 -18.995,4.042 -15.829,3.06 -10.776,1.371 -7.721,0.349 -5.567,-0.324 -3.489,-0.889 -2.674,-1.061 -1.782,-1.061 -1.775,-1.068 0.225,-1.068 0.742,-1.117 1.349,-1.261 2.411,-1.106 3.826,-0.793 5.711,-0.269 8.314,0.556 14.072,2.496 17.36,3.558 20.567,4.505 23.259,5.207 25.7,5.755 28.001,6.187 30.493,6.556 33.003,6.826 35.636,7.011 38.539,7.119 42.438,7.156 49.365,7.113 55.329,7.092 59.349,7.043 61.254,6.951 62.815,6.795 64.904,6.513 ; v1(-0.682,-1.246) v1@-0.682,-1.149
  Bottom Layer w0.152: v1(-65.649,6.604) -65.649,6.019 -65.43,5.8 -65.43,2.532 -65.635,2.327 -65.635,2 -65.659,1.976 -65.659,-2.135 -65.276,-2.518 FPC_PWR.18@-65.081,-2.518 ; FPC_MCU.6@64.974,-2.518 65.028,-2.464 65.354,-2.464 65.659,-2.159 65.659,0.027 65.608,0.078 65.608,0.316 65.539,0.386 65.539,0.964 66.238,1.663 66.238,1.725 66.425,1.912 66.425,2.543 66.238,2.73 66.238,3.924 65.227,4.934 65.227,6.096 65.288,6.096 65.525,6.334 65.525,6.351 65.652,6.477 v1@65.669,6.477
  Bottom Layer w0.203: v1(-0.682,-1.246) -0.75,-1.314 -0.75,-1.768 -0.784,-1.802 -0.784,-2.005 -0.127,-2.662 -0.127,-5.383 0.008,-5.518 0.008,-5.549 0.103,-5.644 0.103,-5.653 0.21,-5.759 IC1.29@0.21,-5.978
I2C1_SDA: FPC_MCU.8 FPC_PWR.16 IC1.28 | length 161.5
  Top Layer w0.152: v1@-66.191,6.062 -65.683,6.062 -65.666,6.045 -65.1,6.045 -64.968,6.178 ; 64.904,6.132 64.94,6.096 66.431,6.096 v1(66.304,6.223)
  Top Layer w0.203: -64.925,6.135 -62.084,6.502 -60.385,6.624 -57.949,6.692 -52.205,6.719 -44.762,6.766 -39.79,6.76 -36.713,6.679 -33.967,6.521 -31.529,6.294 -29.23,5.995 -26.979,5.617 -24.455,5.097 -21.824,4.453 -18.995,3.661 -15.829,2.679 -10.776,0.99 -7.721,-0.032 -5.567,-0.705 -3.625,-1.233 -2.252,-1.523 -1.981,-1.523 -1.905,-1.599 v1(-1.354,-1.7) ; 64.904,6.132 62.815,6.414 61.254,6.57 59.349,6.662 55.329,6.711 49.365,6.732 42.438,6.775 38.539,6.738 35.636,6.63 33.003,6.445 30.493,6.175 28.001,5.806 25.7,5.374 23.259,4.826 20.567,4.124 17.36,3.177 14.072,2.115 8.314,0.175 5.711,-0.65 3.826,-1.174 2.411,-1.487 1.349,-1.642 0.547,-1.678 0.264,-1.651 -0.294,-1.7 -0.508,-1.732 -0.903,-1.732 v1@-1.139,-1.715 ; v1(-1.354,-1.7) -1.209,-1.71 v1@-1.139,-1.715 ; v1(-1.354,-1.7) -1.154,-1.7 v1@-1.139,-1.715
  Bottom Layer w0.152: v1(-66.284,6.223) -65.735,5.674 -65.735,2.658 -65.94,2.454 -65.94,2.126 -65.964,2.102 -65.964,-2.414 -65.501,-2.877 -65.419,-2.877 -65.33,-2.966 -65.33,-3.064 -65.276,-3.118 FPC_PWR.16@-65.081,-3.118 ; FPC_MCU.8@64.974,-3.118 65.599,-3.118 65.913,-2.804 65.913,0.132 65.862,0.183 65.862,0.422 65.842,0.442 65.842,0.669 65.913,0.74 65.913,0.979 66.492,1.557 66.492,1.62 66.679,1.807 66.679,2.648 66.492,2.835 66.492,4.029 65.583,4.938 65.583,5.464 66.304,6.184 v1(66.304,6.223)
  Bottom Layer w0.203: v1(-1.354,-1.7) -1.321,-1.667 -1.321,-2.083 -0.432,-2.972 -0.432,-5.509 -0.297,-5.644 -0.297,-5.734 IC1.28@-0.202,-5.83
LED_1_B: IC1.22 LED1.2 | length 71.4
  Bottom Layer w0.152: LED1.2@-63.318,1.21 -62.036,1.21 -59.309,3.937 -59.309,5.715 -58.224,6.8 -49.003,6.832 -42.076,6.876 -38.177,6.838 -35.275,6.73 -32.642,6.545 -30.131,6.275 -27.64,5.906 -25.338,5.474 -22.897,4.926 -20.205,4.072 -16.998,3.125 -4.775,-0.914 -4.216,-1.473 -4.216,-6.699 -3.387,-7.528 IC1.22@-2.15,-7.528
LED_1_G: IC1.24 LED1.4 | length 68.5
  Bottom Layer w0.152: LED1.4@-61.904,4.886 -61.904,5.787 -60.137,7.554 -59.369,7.554 ; -59.369,7.524 -55.348,7.573 -49.384,7.594 -42.457,7.638 -38.558,7.6 -35.656,7.492 -33.023,7.307 -30.512,7.037 -28.021,6.668 -25.719,6.236 -23.278,5.688 -20.586,4.986 -17.379,4.039 -14.092,2.978 -8.333,1.037 -4.313,-0.238 -4.31,-0.235 -3.708,-0.837 -3.708,-6.489 -3.441,-6.756 -2.178,-6.756 IC1.24@-2.15,-6.728
LED_1_R: IC1.23 LED1.3 | length 68.4
  Bottom Layer w0.152: LED1.3@-60.773,3.755 -60.773,6.283 -60.646,6.283 -59.786,7.143 -59.369,7.143 -55.348,7.192 -49.384,7.213 -42.457,7.257 -38.558,7.219 -35.656,7.111 -33.023,6.926 -30.512,6.656 -28.021,6.287 -25.719,5.855 -23.278,5.307 -20.586,4.605 -17.379,3.658 -14.092,2.597 -8.333,0.656 -4.696,-0.498 -3.962,-1.231 -3.962,-6.594 -3.428,-7.128 IC1.23@-2.15,-7.128
LED_2_B: IC1.7 LED4.2 | length 9.3
  Bottom Layer w0.152: IC1.7@2.15,-9.128 2.351,-9.128 2.578,-9.354 2.578,-10.401 2.845,-10.668 4.66,-10.668 5.329,-9.999 5.329,-8.594 5.182,-8.447 5.182,-6.825 LED4.2@6.107,-5.9
LED_2_G: IC1.9 LED4.4 | length 8.3
  Bottom Layer w0.152: IC1.9@1.4,-10.278 1.4,-10.646 1.93,-11.176 7.163,-11.176 7.707,-10.632 LED4.4@7.707,-9.5
LED_2_R: IC1.8 LED4.3 | length 5.7
  Bottom Layer w0.152: IC1.8@2.15,-9.528 2.15,-10.481 2.591,-10.922 4.765,-10.922 5.583,-10.104 5.583,-10.024 LED4.3@6.107,-9.5
LED_3_B: IC1.4 LED5.2 | length 31.8
  Top Layer w0.152: v1(3.302,-7.722) 3.353,-7.671 3.454,-7.671 3.912,-7.214 4.726,-7.214 5.031,-6.909 5.037,-6.909 6.858,-5.088 6.858,-4.377 7.112,-4.123 v1(7.112,-4.013)
  Bottom Layer w0.152: IC1.4@2.15,-7.928 2.174,-7.904 2.473,-7.904 2.605,-7.772 3.251,-7.772 v1(3.302,-7.722) ; v1(7.112,-4.013) 7.112,-3.962 7.417,-3.658 7.417,-2.249 8.209,-1.456 11.265,-0.434 16.318,1.255 19.483,2.237 22.313,3.03 24.151,3.03 24.726,3.605 24.795,3.673 25.951,3.912 28.39,3.912 LED5.2@28.815,3.487
LED_3_G: IC1.6 LED5.4 | length 32.5
  Top Layer w0.152: v1(2.822,-8.89) 2.822,-8.812 2.845,-8.788 3.87,-8.788 4.593,-8.066 4.986,-8.066 5.254,-8.333 5.338,-8.417 5.512,-8.591 5.512,-8.966 6.147,-9.601 7.62,-9.601 8.788,-8.433 8.788,-4.115 v1(8.585,-3.912)
  Bottom Layer w0.152: IC1.6@2.15,-8.728 2.629,-8.728 2.791,-8.89 v1(2.822,-8.89) ; v1(8.585,-3.912) 8.585,-3.876 11.519,-0.942 16.572,0.747 19.737,1.729 21.84,2.318 ; 21.876,2.283 23.149,1.009 LED5.4@25.751,1.009
LED_3_R: IC1.5 LED5.3 | length 27.8
  Top Layer w0.152: v1(2.794,-8.23) 4.07,-8.23 5.136,-7.163 5.142,-7.163 7.112,-5.193 7.112,-4.724 v1(7.874,-3.962)
  Bottom Layer w0.152: IC1.5@2.15,-8.328 2.696,-8.328 v1(2.794,-8.23) ; v1(7.874,-3.962) 7.874,-2.591 8.966,-1.499 16.064,0.874 19.229,1.856 22.04,2.643 ; 22.041,2.64 22.126,2.555 LED5.3@25.337,2.555 ; 22.041,2.644 22.059,2.649
LED_4_B: IC1.16 LED3.2 | length 11.1
  Bottom Layer w0.152: LED3.2@-7.707,-5.9 -7.183,-5.376 -7.135,-5.376 -6.781,-5.022 -5.433,-5.022 -5.329,-5.126 -5.329,-5.382 -5.232,-5.479 -5.232,-7.12 -5.078,-7.274 -5.078,-9.03 -4.052,-10.057 -1.621,-10.057 -1.574,-10.104 -1.424,-10.104 -1.4,-10.128 IC1.16@-1.4,-10.278
LED_4_G: IC1.18 LED3.4 | length 5.1
  Top Layer w0.152: v1(-5.537,-8.636) -5.508,-8.607 -5.153,-8.607 -4.724,-8.179 -4.623,-8.179 v1(-4.521,-8.28)
  Bottom Layer w0.152: LED3.4@-6.107,-9.5 -5.639,-9.032 -5.639,-8.725 -5.55,-8.636 v1(-5.537,-8.636) ; v1(-4.521,-8.28) -3.674,-9.128 IC1.18@-2.15,-9.128
LED_4_R: IC1.17 LED3.3 | length 7.2
  Top Layer w0.152: v1(-4.928,-9.906) -4.318,-9.296 -4.267,-9.296 v1(-4.267,-9.195)
  Bottom Layer w0.152: LED3.3@-7.707,-9.5 -7.642,-9.565 -7.642,-10.239 -7.315,-10.566 -5.588,-10.566 v1(-4.928,-9.906) ; v1(-4.267,-9.195) -4.186,-9.195 -3.975,-9.406 -2.413,-9.406 -2.324,-9.495 -2.324,-9.504 -2.3,-9.528 IC1.17@-2.15,-9.528
LED_5_B: IC1.19 LED2.2 | length 38.4
  Top Layer w0.152: v1(-5.944,-4.521) -5.893,-4.521 -5.131,-3.759 v1(-5.131,-3.302)
  Bottom Layer w0.152: LED2.2@-29.464,1.905 -29.845,1.905 -30.353,2.413 -30.353,3.937 -29.565,4.725 -26.467,4.725 -6.35,-1.524 -5.182,-2.692 -5.182,-3.048 -5.131,-3.099 v1(-5.131,-3.302) ; v1(-5.944,-4.521) -5.595,-4.521 -5.348,-4.768 -5.328,-4.768 -4.978,-5.118 -4.978,-7.015 -3.265,-8.728 IC1.19@-2.15,-8.728
LED_5_G: IC1.21 LED2.4 | length 28.3
  Bottom Layer w0.152: LED2.4@-25.337,2.555 -22.911,3.353 -6.909,-1.626 -6.909,-2.235 -6.553,-2.591 -6.553,-2.845 -5.138,-4.26 -5.118,-4.26 -4.47,-4.908 -4.47,-6.804 -3.38,-7.895 -2.324,-7.895 -2.324,-7.904 -2.3,-7.928 IC1.21@-2.15,-7.928
LED_5_R: IC1.20 LED2.3 | length 29.5
  Bottom Layer w0.152: LED2.3@-25.751,1.009 -25.504,0.762 -25.019,0.762 -22.79,2.991 -7.417,-1.778 -7.163,-2.032 -7.163,-2.594 -5.243,-4.514 -5.223,-4.514 -4.724,-5.013 -4.724,-6.909 -3.306,-8.328 IC1.20@-2.15,-8.328
LED_6_B: IC1.1 LED6.2 | length 71.9
  Top Layer w0.152: v1(1.981,-6.198) 2.097,-6.082 2.588,-6.082 2.653,-6.147 4.721,-6.147 5.069,-5.799 5.069,-5.649 6.096,-4.623 5.486,-4.013 v1(5.486,-3.912)
  Bottom Layer w0.152: v1(1.981,-6.198) 1.981,-6.231 2.15,-6.399 IC1.1@2.15,-6.728 ; 5.69,-4.115 v1(5.486,-3.912) 5.486,-2.384 5.42,-2.318 5.42,-1.367 7.574,-0.694 10.63,0.328 15.683,2.017 18.848,2.999 21.678,3.792 24.308,4.435 26.832,4.956 29.083,5.333 31.382,5.632 33.821,5.859 36.567,6.017 39.643,6.098 62.228,6.098 62.84,5.486 62.967,5.486 63.475,4.978 63.475,4.732 64.364,3.843 64.364,3.168 64.449,3.082 LED6.2@64.449,2.341
LED_6_G: IC1.3 LED6.4 | length 64.4
  Top Layer w0.152: v1(3.302,-7.061) 3.404,-6.96 4.621,-6.96 4.926,-6.655 4.932,-6.655 6.604,-4.983 6.604,-3.696 6.942,-3.358 v1(6.942,-3.315)
  Bottom Layer w0.152: IC1.3@2.15,-7.528 2.16,-7.518 2.845,-7.518 v1(3.302,-7.061) ; v1(6.942,-3.315) 6.942,-3.208 6.756,-3.023 6.756,-2.438 7.955,-1.239 7.955,-1.202 11.011,-0.18 16.064,1.509 19.229,2.491 22.059,3.284 24.689,3.927 27.213,4.448 29.464,4.825 31.763,5.124 34.202,5.351 36.948,5.509 59.018,5.509 LED6.4@60.773,3.755
LED_6_R: IC1.2 LED6.3 | length 65.8
  Top Layer w0.152: v1(2.794,-6.604) 4.618,-6.604 4.821,-6.401 4.827,-6.401 5.323,-5.904 5.323,-5.755 6.35,-4.728 6.35,-4.518 6.147,-4.314 6.147,-3.638 v1(6.096,-3.587)
  Bottom Layer w0.152: IC1.2@2.15,-7.128 2.174,-7.104 2.489,-7.104 2.578,-7.015 2.578,-6.896 2.794,-6.68 v1(2.794,-6.604) ; v1(6.096,-3.587) 6.096,-2.68 7.828,-0.948 10.884,0.074 15.937,1.763 19.102,2.745 21.932,3.538 24.562,4.181 27.086,4.702 29.337,5.079 31.636,5.378 34.075,5.605 36.821,5.763 39.897,5.844 61.706,5.844 61.85,5.7 61.85,5.681 61.904,5.627 LED6.3@61.904,4.886
LED_L_B: IC1.10 LED7.3 | length 83.1
  Bottom Layer w0.152: IC1.10@1,-10.278 1,-11.074 1.016,-11.074 1.372,-11.43 8.708,-11.43 8.714,-11.424 9.721,-7.395 10.074,-6.773 10.533,-6.157 11.067,-5.6 11.62,-5.135 12.206,-4.718 13.132,-4.16 14.423,-3.508 15.971,-2.834 17.071,-2.405 18.182,-2.003 20.52,-1.239 22.886,-0.555 25.206,0.041 27.544,0.564 29.972,1.016 31.896,1.3 33.826,1.513 35.997,1.667 36.31,1.98 38.25,1.98 40.431,2.057 42.613,2.081 44.997,2.083 46.485,2.058 47.97,2.002 50.06,1.853 51.93,1.63 53.6,1.343 54.44,1.159 55.276,0.946 56.544,0.555 57.78,0.078 58.865,-0.433 59.835,-0.984 60.392,-1.351 60.929,-1.751 61.723,-2.442 62.446,-3.204 63.031,-3.947 63.609,-4.835 63.936,-5.162 63.936,-6.422 65.659,-10.541 66.04,-10.541 66.802,-11.303 67.056,-11.303
  Bottom Layer w0.254: LED7.3@66.121,-14.674 66.121,-14.649 66.416,-14.353 66.511,-14.353 67.208,-13.656 67.208,-11.643 67.056,-11.49 67.056,-11.303
LED_L_G: IC1.12 LED7.4 | length 86.5
  Top Layer w0.152: v1(0.102,-14.275) ccw(c0.224,-14.152) 0.224,-14.326 2.376,-14.326 2.478,-14.427 5.639,-14.427 v1(7.772,-12.294)
  Bottom Layer w0.152: v1(0.102,-14.275) 0.102,-10.516 cw(c0.438,-10.516) IC1.12@0.2,-10.278 ; v1(7.772,-12.294) 8.839,-12.294 8.89,-12.344 10.102,-7.649 10.455,-7.027 10.914,-6.411 11.448,-5.854 12.001,-5.389 12.587,-4.972 13.513,-4.414 14.804,-3.762 16.352,-3.088 17.452,-2.659 18.563,-2.257 20.901,-1.493 23.267,-0.809 25.587,-0.213 27.925,0.31 30.353,0.762 32.277,1.046 34.207,1.259 36.378,1.413 36.501,1.536 37.773,1.536 37.956,1.543 38.026,1.613 40.206,1.689 42.389,1.714 44.772,1.716 46.26,1.691 47.746,1.635 49.835,1.486 51.706,1.263 53.375,0.976 54.215,0.792 55.051,0.579 56.319,0.187 57.555,-0.289 58.64,-0.8 59.61,-1.351 60.167,-1.718 60.705,-2.118 61.499,-2.81 62.221,-3.571 62.807,-4.314 63.385,-5.202 63.627,-5.588 63.65,-6.454 65.378,-10.728 66.207,-11.557 66.548,-11.557
  Bottom Layer w0.254: LED7.4@66.121,-13.774 66.121,-13.749 66.269,-13.601 66.409,-13.601 66.802,-13.208 66.802,-11.811 66.548,-11.557
LED_L_R: IC1.11 LED7.2 | length 80.5
  Bottom Layer w0.152: IC1.11@0.6,-10.278 0.6,-11.319 0.965,-11.684 5.842,-11.684 6.96,-12.802 9.093,-12.802 10.324,-7.971 10.677,-7.349 11.136,-6.733 11.67,-6.176 12.223,-5.711 12.808,-5.294 13.735,-4.736 15.025,-4.084 16.574,-3.41 17.674,-2.981 18.785,-2.579 21.123,-1.815 23.489,-1.131 25.809,-0.535 28.146,-0.012 30.575,0.44 32.498,0.724 34.429,0.937 36.599,1.091 ; 36.599,1.167 36.854,1.167 36.912,1.225 37.166,1.225 37.173,1.232 37.899,1.232 40.079,1.308 42.262,1.333 44.645,1.335 46.133,1.31 47.619,1.254 49.708,1.105 51.579,0.882 53.248,0.595 54.088,0.411 54.924,0.198 56.192,-0.194 57.428,-0.67 58.513,-1.181 59.483,-1.732 60.04,-2.099 60.578,-2.499 61.372,-3.191 62.094,-3.952 62.68,-4.695 63.258,-5.583 63.258,-6.211 63.246,-6.223 64.897,-10.541 64.897,-11.925 65.422,-12.45 65.422,-12.6 65.646,-12.824 LED7.2@65.796,-12.824
LED_R_B: IC1.13 LED8.3 | length 81
  Bottom Layer w0.152: -66.446,-12.09 -65.945,-11.589 -65.672,-11.589 -64.775,-10.692 -63.084,-6.268 -63.096,-6.256 -63.096,-5.628 -62.518,-4.74 -61.932,-3.998 -61.21,-3.236 -60.415,-2.544 -59.878,-2.145 -59.321,-1.777 -58.351,-1.226 -57.266,-0.716 -56.03,-0.239 -54.762,0.153 -53.926,0.366 -53.086,0.55 -51.417,0.837 -49.546,1.06 -47.457,1.209 -45.971,1.265 -44.483,1.29 -42.099,1.288 -39.917,1.263 -37.737,1.186 -37.01,1.186 -37.003,1.179 -36.749,1.179 -36.692,1.122 -36.437,1.122 ; -36.437,1.045 -34.267,0.891 -32.336,0.679 -30.413,0.395 -27.984,-0.057 -25.647,-0.58 -23.327,-1.177 -20.961,-1.86 -18.623,-2.624 -17.512,-3.026 -16.412,-3.456 -14.863,-4.129 -13.572,-4.781 -12.646,-5.339 -12.06,-5.756 -11.508,-6.221 -10.973,-6.778 -10.515,-7.394 -10.162,-8.017 -9.144,-12.192 -1.913,-12.192 -0.224,-10.503 -0.224,-10.302 IC1.13@-0.2,-10.278
  Bottom Layer w0.254: -66.446,-12.09 -66.455,-12.099 -66.455,-13.42 -66.274,-13.601 -66.249,-13.601 -66.101,-13.749 LED8.3@-66.101,-13.774
LED_R_G: IC1.15 LED8.4 | length 82.5
  Top Layer w0.152: v1(-2.743,-11.684) -2.665,-11.606 -2.665,-11.415 -2.642,-11.392 -2.642,-10.719 v1(-2.692,-10.668)
  Bottom Layer w0.152: -66.04,-11.176 -65.618,-11.176 -65.216,-10.774 -63.488,-6.499 -63.465,-5.633 -63.223,-5.247 -62.645,-4.359 -62.059,-3.617 -61.337,-2.855 -60.542,-2.163 -60.005,-1.764 -59.448,-1.396 -58.478,-0.845 -57.393,-0.335 -56.157,0.142 -54.889,0.534 -54.053,0.747 -53.213,0.931 -51.544,1.218 -49.673,1.441 -47.584,1.59 -46.098,1.646 -44.61,1.671 -42.226,1.669 -40.044,1.644 -37.864,1.567 -37.794,1.498 -37.61,1.491 -36.339,1.491 -36.216,1.368 -34.045,1.213 -32.115,1.001 -30.191,0.717 -27.763,0.265 -25.425,-0.258 -23.105,-0.854 -20.739,-1.538 -18.401,-2.302 -17.29,-2.704 -16.19,-3.134 -14.642,-3.807 -13.351,-4.459 -12.425,-5.017 -11.839,-5.434 -11.286,-5.899 -10.752,-6.456 -10.293,-7.072 -9.94,-7.694 -8.89,-11.786 -2.845,-11.786 v1(-2.743,-11.684) ; v1(-2.692,-10.668) -2.655,-10.706 -1.226,-10.706 -1.024,-10.503 -1.024,-10.302 IC1.15@-1,-10.278
  Bottom Layer w0.254: LED8.4@-66.101,-14.674 -66.101,-14.649 -66.397,-14.353 -66.492,-14.353 -66.853,-13.993 -66.853,-11.862 -66.167,-11.176 -66.04,-11.176
LED_R_R: IC1.14 LED8.2 | length 84.2
  Bottom Layer w0.152: -65.497,-10.586 -65.495,-10.581 -63.774,-6.467 -63.774,-5.207 -63.447,-4.88 -62.869,-3.992 -62.284,-3.249 -61.561,-2.488 -60.767,-1.796 -60.23,-1.397 -59.673,-1.029 -58.703,-0.478 -57.618,0.033 -56.382,0.509 -55.114,0.901 -54.278,1.114 -53.437,1.298 -51.768,1.585 -49.898,1.808 -47.808,1.957 -46.322,2.013 -44.835,2.038 -42.451,2.036 -40.269,2.011 -38.088,1.934 -36.148,1.934 -35.835,1.622 -33.664,1.467 -31.734,1.255 -29.81,0.971 -27.382,0.519 -25.044,-0.004 -22.724,-0.6 -20.358,-1.284 -18.02,-2.048 -16.909,-2.45 -15.809,-2.88 -14.261,-3.553 -12.97,-4.205 -12.044,-4.763 -11.458,-5.18 -10.905,-5.645 -10.371,-6.202 -9.912,-6.818 -9.559,-7.44 -8.598,-11.227 -1.347,-11.227 -0.722,-10.602 -0.722,-10.541 -0.633,-10.452 -0.624,-10.452 -0.6,-10.428 IC1.14@-0.6,-10.278
  Bottom Layer w0.254: LED8.2@-65.776,-15.624 -65.906,-15.494 -66.548,-15.494 -67.208,-14.834 -67.208,-11.455 -66.328,-10.575 -65.508,-10.575
LH_DIODE_ARRAY: D1.1 FPC_MCU.5 FPC_PWR.19 | length 153.4
  Top Layer w0.152: v1(-68.682,1.93) -68.46,2.152 -67.276,2.152 -66.939,2.489 -66.665,2.489 -64.749,4.406 ; D1.1@-3.438,-4.699 -3.438,-3.25 -3.421,-3.232 ; 64.904,4.354 65.394,4.354 69.037,0.711 v1(69.24,0.711)
  Top Layer w0.203: -64.749,4.406 -62.23,4.77 -61.265,4.851 -60.385,4.719 -57.949,4.787 -52.205,4.814 -44.762,4.861 -39.79,4.855 -36.713,4.774 -33.967,4.616 -31.529,4.389 -29.23,4.09 -28.194,4.013 -25.654,3.556 -25.565,3.421 -24.455,3.192 -21.824,2.548 -18.995,1.756 -15.829,0.774 -10.776,-0.915 -7.721,-1.937 -5.567,-2.61 -3.625,-3.138 -3.41,-3.184 -2.252,-3.428 -1.238,-3.561 -0.568,-3.582 -0.019,-3.529 0.547,-3.583 1.349,-3.547 3.464,-3.079 3.841,-3.079 4.025,-2.896 5.371,-2.896 5.711,-2.555 8.314,-1.73 14.072,0.21 17.36,1.272 20.567,2.219 23.259,2.921 25.7,3.469 28.001,3.901 30.493,4.27 33.003,4.54 35.636,4.725 38.539,4.833 42.438,4.87 49.365,4.827 55.329,4.806 59.349,4.757 61.254,4.665 63.381,4.665 64.746,4.481 64.777,4.481 64.904,4.354
  Bottom Layer w0.152: v1@-68.623,1.872 -69.088,1.407 -69.088,-1.34 -68.451,-1.977 -68.369,-1.977 -68.28,-2.066 -68.28,-2.164 -68.226,-2.218 FPC_PWR.19@-67.956,-2.218 ; FPC_MCU.5@67.849,-2.218 68.119,-2.218 68.173,-2.164 68.173,-2.121 68.629,-2.121 69.098,-1.653 69.098,0.459 69.24,0.601 v1(69.24,0.711)
NetC1_1: C1.1 C2.1 IC1.27 | length 3
  Bottom Layer w0.152: C1.1@-2.819,-4.544 -1.783,-4.544 -1.372,-4.955 -1.372,-5.015 -1.003,-5.384 -0.992,-5.384 -0.624,-5.753 -0.624,-5.954 IC1.27@-0.6,-5.978
NetC3_2: C3.2 IC1.32 | length 2.6
  Bottom Layer w0.152: IC1.32@1.41,-5.978 1.376,-5.944 1.376,-5.528 1.372,-5.523 1.372,-3.914 1.707,-3.579 C3.2@1.727,-3.579
NetIC1_31: IC1.31 R1.1 | length 2.4
  Bottom Layer w0.152: R1.1@0.711,-3.7 0.711,-3.775 1.01,-4.073 IC1.31@1.01,-5.978
NetR10_1: R10.1 U2.2 | length 18.4
  Bottom Layer w0.152: R10.1@3.645,-12.192 3.645,-12.213 3.848,-12.416 3.869,-12.416 4.191,-12.738 4.191,-16.129 8.433,-20.371 8.433,-23.8 10.033,-25.4 10.033,-27.168 9.633,-27.569 U2.2@9.633,-27.766
PA0: FPC_MCU.10 FPC_PWR.14 | length 159
  Top Layer w0.152: v1(-66.802,5.588) -66.726,5.664 -66.158,5.664 -66.107,5.715 -66.074,5.715 -66.048,5.74 -64.974,5.74 -64.961,5.754 -64.925,5.754 ; -2.252,-1.904 -1.906,-1.904 -1.651,-2.159 -1.016,-2.159 -0.913,-2.056 -0.568,-2.056 ; 64.904,5.751 66.711,5.751 v1(67.056,6.096)
  Top Layer w0.203: -64.925,5.754 -62.084,6.121 -60.385,6.243 -57.949,6.311 -52.205,6.338 -44.762,6.385 -39.79,6.379 -36.713,6.298 -33.967,6.14 -31.529,5.913 -29.23,5.614 -26.979,5.236 -24.455,4.716 -21.824,4.072 -18.995,3.28 -15.829,2.298 -10.776,0.609 -7.721,-0.413 -5.567,-1.086 -3.625,-1.614 -2.252,-1.904 ; -0.568,-2.058 -0.019,-2.005 0.547,-2.059 1.349,-2.023 2.411,-1.868 3.826,-1.555 5.711,-1.031 8.314,-0.206 14.072,1.734 17.36,2.796 20.567,3.743 23.259,4.445 25.7,4.993 28.001,5.425 30.493,5.794 33.003,6.064 35.636,6.249 38.539,6.357 42.438,6.394 49.365,6.351 55.329,6.33 59.349,6.281 61.254,6.189 62.815,6.033 64.904,5.751
  Bottom Layer w0.152: v1(-66.802,5.588) -66.04,4.826 -66.04,2.784 -66.244,2.58 -66.244,2.253 -66.269,2.229 -66.269,-2.726 -65.276,-3.718 FPC_PWR.14@-65.081,-3.718 ; FPC_MCU.10@64.974,-3.718 65.028,-3.664 65.412,-3.664 66.167,-2.909 66.167,0.237 66.116,0.288 66.116,0.328 66.167,0.379 66.167,0.873 66.746,1.452 66.746,1.514 66.933,1.701 66.933,2.754 66.746,2.941 66.746,4.134 66.192,4.687 66.192,5.003 65.837,5.358 66.244,5.766 66.493,5.766 66.761,6.034 66.761,6.055 66.802,6.096 v1(67.056,6.096)
TP_NOSE: FPC_MCU.2 U3.4 | length 103.7
  Top Layer w0.152: v1(-2.54,-13.716) -2.54,-13.678 -2.286,-13.424 -2.286,-13.222 -0.672,-11.608 1.739,-11.608 3.505,-9.841 3.505,-9.398 3.607,-9.296 3.648,-9.337 v1(3.667,-9.337)
  Bottom Layer w0.152: U3.4@-10.574,-25.527 -10.574,-25.052 -9.832,-24.31 -7.217,-18.934 -3.302,-15.824 -2.54,-15.062 v1(-2.54,-13.716) ; 3.352,-2.299 3.364,-1.161 3.736,-0.789 4.075,-0.696 5.08,-0.457 6.787,0.068 9.893,1.141 15.759,3.084 19.026,4.066 21.856,4.808 24.486,5.451 27.01,5.972 29.261,6.349 31.56,6.648 33.998,6.875 36.744,7.033 39.821,7.114 44.794,7.12 52.236,7.073 57.98,7.046 58.162,6.864 63.636,6.864 64.389,6.11 64.389,5.054 65.73,3.713 65.73,2.52 65.917,2.333 65.917,2.122 65.481,1.687 65.481,1.624 65.031,1.174 65.031,0.815 64.578,0.362 64.578,0.076 64.592,0.062 64.592,-0.646 65.21,-1.264 65.157,-1.318 FPC_MCU.2@64.974,-1.318 ; 3.365,-2.299 4.014,-2.948 4.014,-4.421 4.064,-4.47 4.064,-7.573 4.039,-7.599 4.039,-8.153 3.654,-8.538 3.667,-8.551 v1(3.667,-9.337)
TP_NOSE_GND: FPC_MCU.4 U3.2 | length 108.4
  Top Layer w0.152: v1@-3.19,-13.564 -3.113,-13.486 -2.956,-13.486 0.877,-9.652 v1(3.048,-9.652) ; v1(64.135,-0.127) 64.528,0.266 64.666,0.127 v1(65.151,0.127)
  Bottom Layer w0.152: U3.2@-12.774,-26.797 -11.403,-25.426 -11.403,-24.865 -10.287,-23.749 -7.62,-18.796 -7.366,-18.542 -3.556,-15.621 -3.253,-15.318 -3.253,-13.565 v1(-3.251,-13.564) ; v1(3.048,-9.652) 3.126,-9.574 3.126,-9.232 3.279,-9.079 3.279,-8.701 3.251,-8.673 3.251,-8.433 3.785,-7.899 3.785,-7.493 3.81,-7.468 3.81,-4.576 3.76,-4.526 3.76,-3.202 3.094,-2.536 3.094,-0.868 3.439,-0.523 3.555,-0.523 5.496,0.005 7.651,0.678 10.706,1.699 15.759,3.389 18.925,4.371 21.754,5.163 24.385,5.807 26.908,6.327 29.16,6.704 31.459,7.004 33.897,7.231 36.643,7.389 39.719,7.47 44.692,7.476 52.135,7.429 57.878,7.401 60.315,7.334 63.324,7.118 63.782,7.118 64.897,6.002 64.897,4.905 65.984,3.818 65.984,2.625 66.171,2.438 66.171,2.017 65.984,1.83 65.984,1.768 65.285,1.069 65.285,0.558 65.036,0.309 65.151,0.193 v1(65.151,0.127) ; v1(64.135,-0.127) 64.008,-0.254 64.008,-1.27 64.656,-1.918 FPC_MCU.4@64.974,-1.918
TP_NOSE_THERM: FPC_MCU.1 U3.3 | length 107.2
  Top Layer w0.152: v1(-1.829,-13.411) 0.305,-13.411 0.312,-13.418 v1@3.875,-9.855 ; v1@3.861,-9.855 v1@3.875,-9.855 ; 4.321,-9.331 4.321,-9.409 v1@3.875,-9.855 ; 4.518,-9.23 4.111,-9.636 v1(4.111,-9.828) 4.084,-9.855 v1@3.875,-9.855
  Top Layer w0.203: v1(65.227,3.505) 65.456,3.505 65.246,3.715 67.564,1.397 67.818,1.397 68.199,1.016 v1(68.199,0.635)
  Bottom Layer w0.152: U3.3@-11.039,-27.262 -10.879,-27.262 -9.398,-25.781 -9.398,-24.384 -6.731,-19.05 -3.175,-16.129 -1.983,-14.937 -1.983,-13.565 v1(-1.829,-13.411) ; v1(4.111,-9.828) 4.125,-9.814 4.125,-9.148 4.115,-9.138 4.115,-8.436 4.293,-8.259 4.293,-7.704 4.318,-7.678 4.318,-2.892 3.618,-2.192 3.618,-1.266 3.761,-1.123 5.293,-0.707 7.447,-0.034 10.503,0.988 15.556,2.678 18.721,3.66 21.551,4.452 24.181,5.096 26.705,5.616 28.956,5.993 31.255,6.292 33.694,6.519 36.44,6.678 39.516,6.759 44.489,6.765 51.931,6.718 57.675,6.69 57.976,6.69 58.057,6.61 62.609,6.61 62.7,6.519 63.585,6.519 64.008,6.096
  Bottom Layer w0.203: 64.008,6.096 64.008,4.953 65.024,3.937 64.897,3.81 64.992,3.715 65.202,3.505 v1(65.227,3.505) ; FPC_MCU.1@67.849,-1.018 68.023,-1.018 68.052,-0.99 68.052,-0.702 68.152,-0.602 68.152,0.588 v1(68.199,0.635)